# EAGLE board HominiPulseSensorBatt_Panelized (EAGLE 8.0.1)
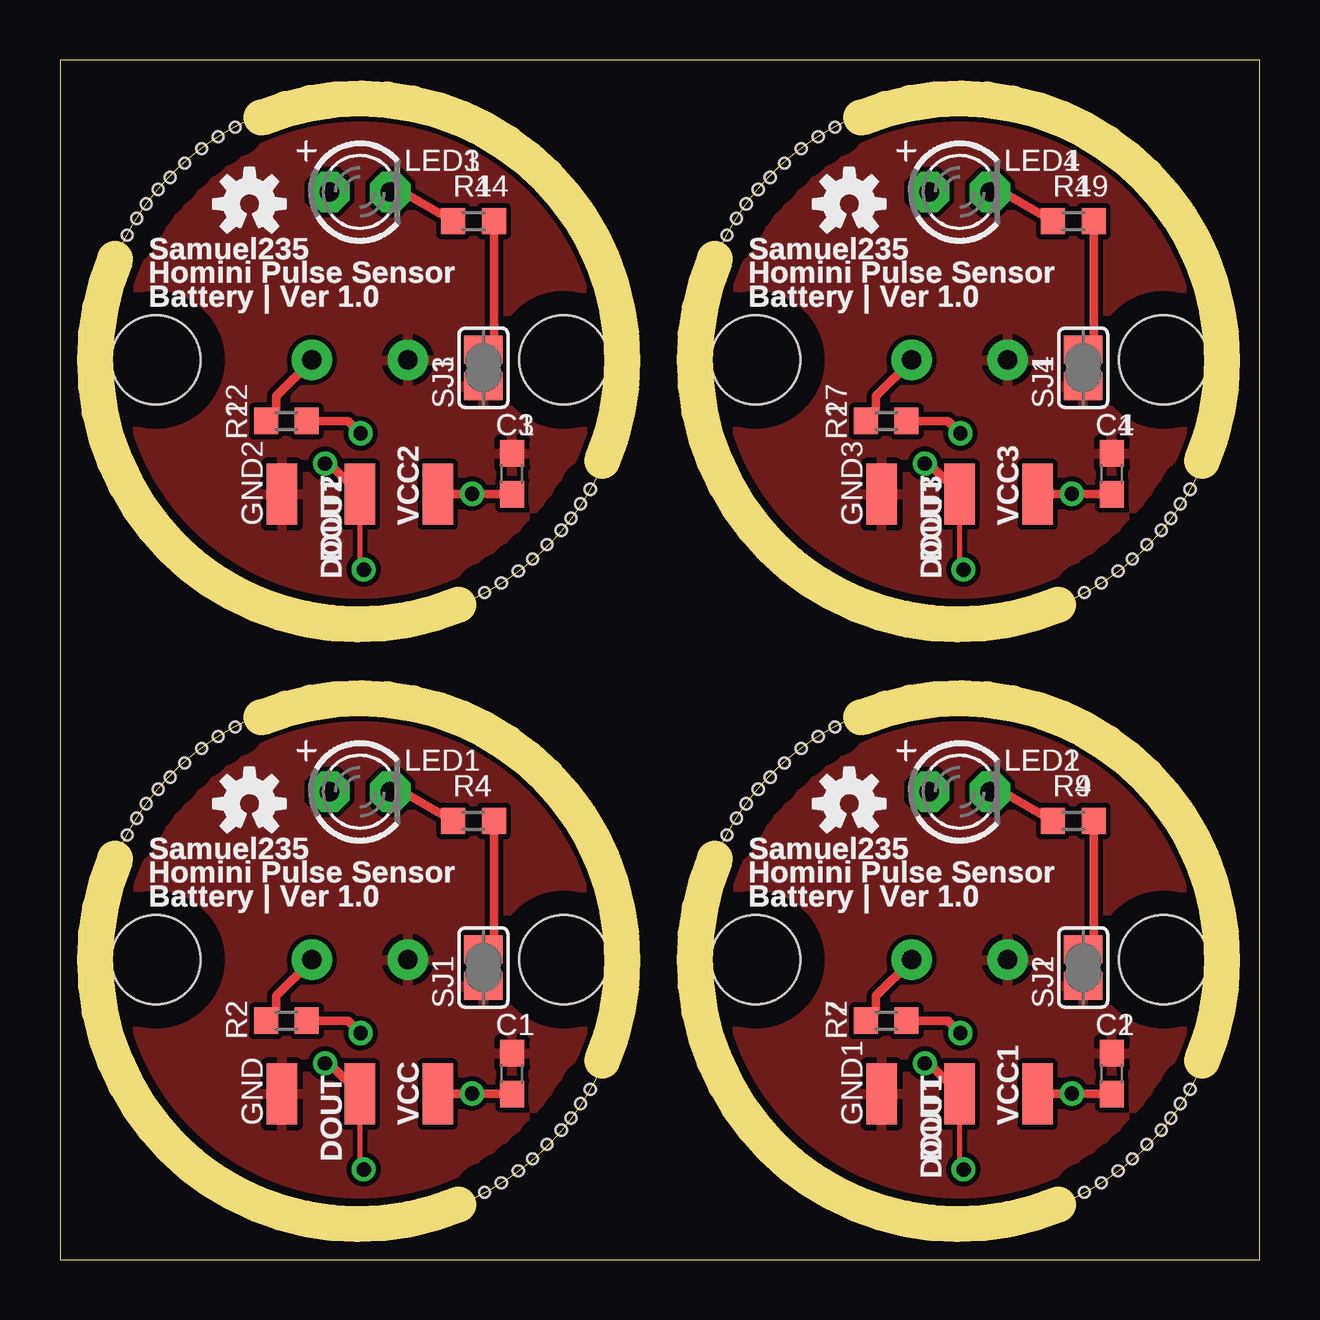
[diagram p0: board, top side]
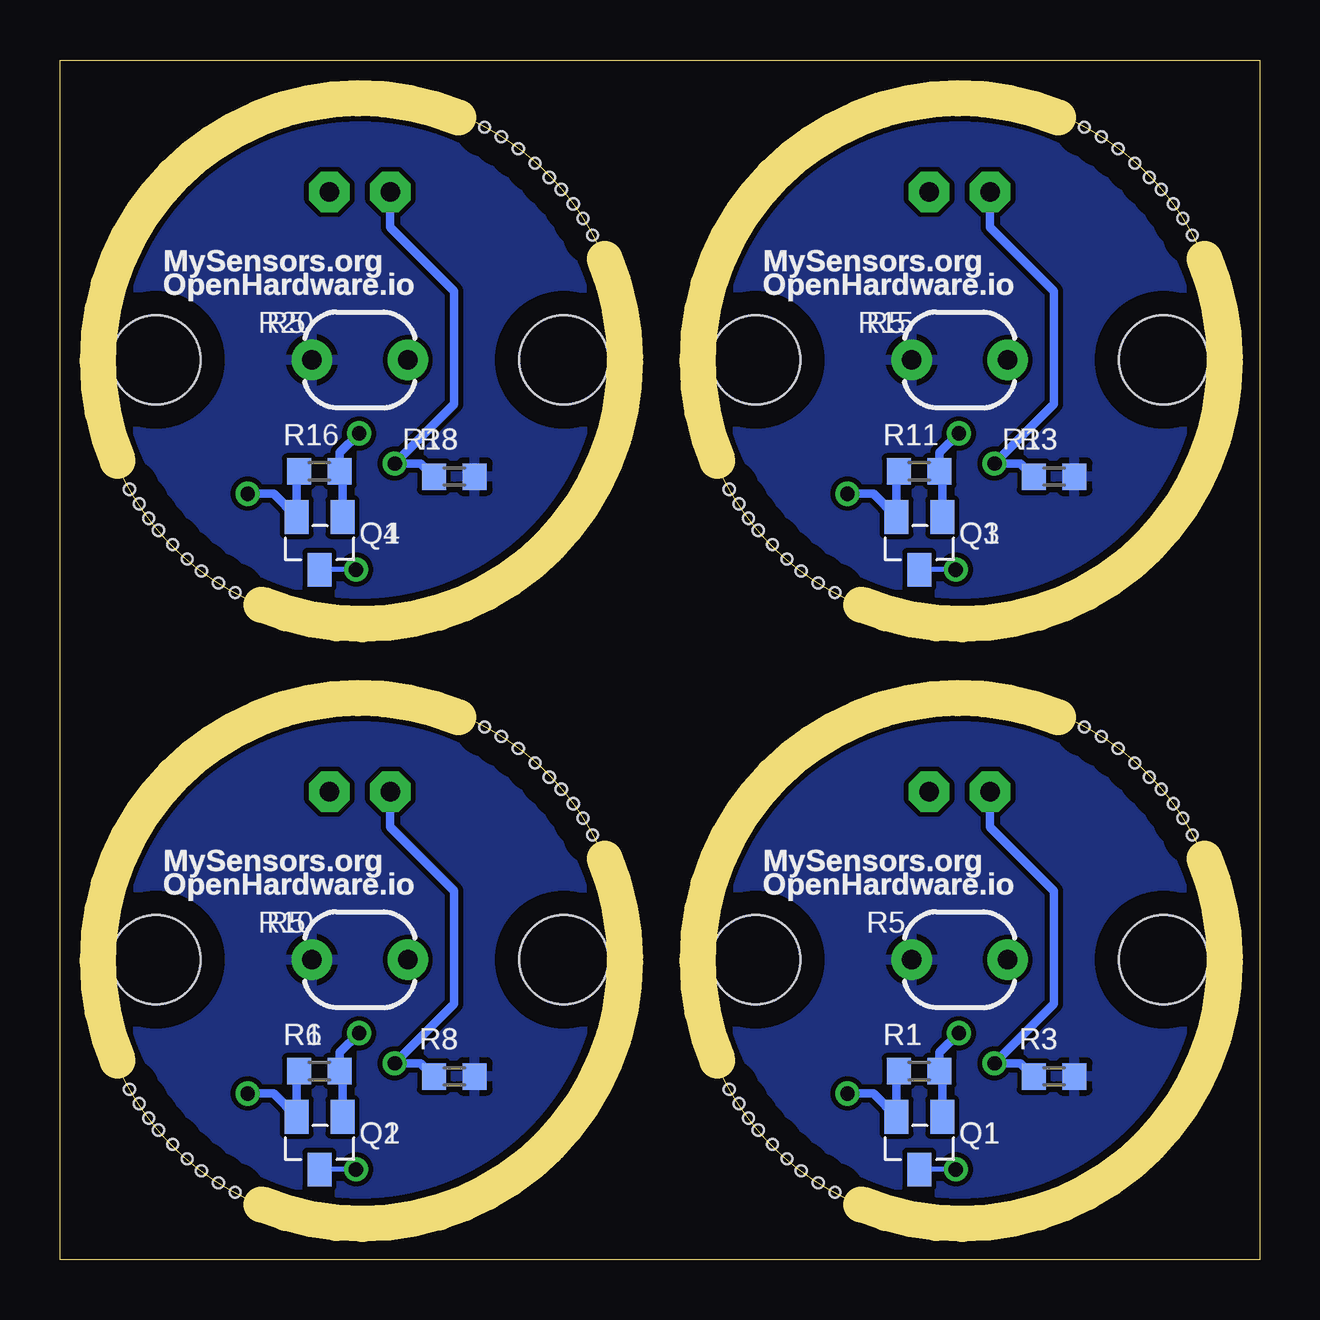
[diagram p1: board, bottom side, seen from below]

Size 50 x 50 mm. Coordinates in mm from the lower left corner, seen from the top.
Outline: 0,0 50,0 50,50 0,50 0,0
Outline: circle at 12.5,12.5 radius 11
Outline: circle at 37.5,12.5 radius 11
Outline: circle at 12.5,37.5 radius 11
Outline: circle at 37.5,37.5 radius 11
Copper layers (1*16): Top 0.035mm / dielectric 1.5mm / Bottom 0.035mm
Design rules "default *": minimum track width 10mil, minimum drill 0.3mm, track to track 8mil, track to pad 8mil, pad to pad 8mil, via to via 8mil, smd to smd 8mil, copper to edge 40mil, drill to drill 8mil, minimum pad ring 10mil, minimum via ring 8mil, stop-mask expansion 4mil, vias tented up to drill 0mil, thermal gap 10mil
Holes 3.7 mm at 4,12.5 21,12.5 29,12.5 46,12.5 4,37.5 21,37.5 29,37.5 46,37.5
Holes 0.45 mm at 2.8,17.7 3.2,18.4 3.6,19 4.1,19.6 4.6,20.1 5.2,20.7 5.9,21.3 6.6,21.8 7.3,22.2 17.7,2.8 18.4,3.2 19.1,3.7 19.7,4.2 20.3,4.8 20.9,5.4 21.3,5.9 21.7,6.5 22.1,7.1 27.8,17.7 28.2,18.4 28.6,19 29.1,19.6 29.6,20.1 30.2,20.7 30.9,21.3 31.6,21.8 32.3,22.2 42.7,2.8 43.4,3.2 44.1,3.7 44.7,4.2 45.3,4.8 45.9,5.4 46.3,5.9 46.7,6.5 47.1,7.1 2.8,42.7 3.2,43.4 3.6,44 4.1,44.6 4.6,45.1 5.2,45.7 5.9,46.3 6.6,46.8 7.3,47.2 17.7,27.8 18.4,28.2 19.1,28.7 19.7,29.2 20.3,29.8 20.9,30.4 21.3,30.9 21.7,31.5 22.1,32.1 27.8,42.7 28.2,43.4 28.6,44 29.1,44.6 29.6,45.1 30.2,45.7 30.9,46.3 31.6,46.8 32.3,47.2 42.7,27.8 43.4,28.2 44.1,28.7 44.7,29.2 45.3,29.8 45.9,30.4 46.3,30.9 46.7,31.5 47.1,32.1
Milling: 8 lines

## Footprints (pad centres in the part's own frame; a part is rotated, then mirrored left to right if it is on the bottom)
C0603 = smd 1.1 x 1: 1 -0.85,0; 2 0.85,0
SMD1,27-2,54 = smd 1.27 x 2.54: 1 0,0
LED3MM = drill 0.813 pad 1.676 octagon: A -1.27,0; K 1.27,0
SOT23 = smd 1 x 1.4: 1 -0.95,-1.1; 2 0.95,-1.1; 3 0,1.1
R0603 = smd 1 x 1.1: 1 -0.85,0; 2 0.85,0
LDR-PTH = drill 0.8 pad 1.676: 1 -2,0; 2 2,0
SJ = smd 1.168 x 1.6: 1 -0.762,0; 2 0.762,0

## Placement (x,y rotation side)
C1  0.1uF  [C0603]  18.85,7.75 90 top
C2  0.1uF  [C0603]  43.85,7.75 90 top
C3  0.1uF  [C0603]  18.85,32.75 90 top
C4  0.1uF  [C0603]  43.85,32.75 90 top
DOUT  [SMD1,27-2,54]  12.5,6.9 0 top
DOUT1  [SMD1,27-2,54]  37.5,6.9 0 top
DOUT2  [SMD1,27-2,54]  12.5,31.9 0 top
DOUT3  [SMD1,27-2,54]  37.5,31.9 0 top
GND  [SMD1,27-2,54]  9.25,6.9 0 top
GND1  [SMD1,27-2,54]  34.25,6.9 0 top
GND2  [SMD1,27-2,54]  9.25,31.9 0 top
GND3  [SMD1,27-2,54]  34.25,31.9 0 top
LED1  Red  [LED3MM]  12.5,19.5 0 top
LED2  Red  [LED3MM]  37.5,19.5 0 top
LED3  Red  [LED3MM]  12.5,44.5 0 top
LED4  Red  [LED3MM]  37.5,44.5 0 top
LOGO1  OSHW-LOGOS  [OSHW-LOGO-S]  7.9,19 0 top
LOGO2  OSHW-LOGOS  [OSHW-LOGO-S]  32.9,19 0 top
LOGO3  OSHW-LOGOS  [OSHW-LOGO-S]  7.9,44 0 top
LOGO4  OSHW-LOGOS  [OSHW-LOGO-S]  32.9,44 0 top
Q1  BS250SMD  [SOT23]  14.18,4.85 180 bottom
Q2  BS250SMD  [SOT23]  39.18,4.85 180 bottom
Q3  BS250SMD  [SOT23]  14.18,29.85 180 bottom
Q4  BS250SMD  [SOT23]  39.18,29.85 180 bottom
R1  330K  [R0603]  14.19,7.85 180 bottom
R2  100K  [R0603]  9.44,9.95 0 top
R3  470K  [R0603]  8.56,7.63 180 bottom
R4  1K5  [R0603]  17.24,18.28 180 top
R5  5549-LDR  [LDR-PTH]  12.5,12.5 0 bottom
R6  330K  [R0603]  39.19,7.85 180 bottom
R7  100K  [R0603]  34.44,9.95 0 top
R8  470K  [R0603]  33.56,7.63 180 bottom
R9  1K5  [R0603]  42.24,18.28 180 top
R10  5549-LDR  [LDR-PTH]  37.5,12.5 0 bottom
R11  330K  [R0603]  14.19,32.85 180 bottom
R12  100K  [R0603]  9.44,34.95 0 top
R13  470K  [R0603]  8.56,32.63 180 bottom
R14  1K5  [R0603]  17.24,43.28 180 top
R15  5549-LDR  [LDR-PTH]  12.5,37.5 0 bottom
R16  330K  [R0603]  39.19,32.85 180 bottom
R17  100K  [R0603]  34.44,34.95 0 top
R18  470K  [R0603]  33.56,32.63 180 bottom
R19  1K5  [R0603]  42.24,43.28 180 top
R20  5549-LDR  [LDR-PTH]  37.5,37.5 0 bottom
SJ1  [SJ]  17.65,12.17 90 top
SJ2  [SJ]  42.65,12.17 90 top
SJ3  [SJ]  17.65,37.17 90 top
SJ4  [SJ]  42.65,37.17 90 top
VCC  [SMD1,27-2,54]  15.75,6.9 0 top
VCC1  [SMD1,27-2,54]  40.75,6.9 0 top
VCC2  [SMD1,27-2,54]  15.75,31.9 0 top
VCC3  [SMD1,27-2,54]  40.75,31.9 0 top

## Library data of the parts
C1-C4 R1-R4 R6-R9 R11-R14 R16-R19 = rcl
DOUT DOUT1-DOUT3 GND GND1-GND3 VCC VCC1-VCC3 = wirepad
LED1-LED4 = adafruit
LOGO1-LOGO4 = SparkFun-Aesthetics
Q1-Q4 = transistor-small-signal
R5 R10 R15 R20 = Misc
SJ1-SJ4 = jumper

## Nets
GND: C1.2 GND.1 R3.1 R5.1 SJ1.1
GND1: C2.2 GND1.1 R8.1 R10.1 SJ2.1
GND2: C3.2 GND2.1 R13.1 R15.1 SJ3.1
GND3: C4.2 GND3.1 R18.1 R20.1 SJ4.1
N$1: Q1.1 R1.1 R2.2
N$2: R2.1 R5.2
N$3: DOUT.1 LED1.A Q1.3 R3.2
N$4: R4.1 SJ1.2
N$5: LED1.K R4.2
N$6: Q2.1 R6.1 R7.2
N$7: R7.1 R10.2
N$8: DOUT1.1 LED2.A Q2.3 R8.2
N$9: R9.1 SJ2.2
N$10: LED2.K R9.2
N$11: Q3.1 R11.1 R12.2
N$12: R12.1 R15.2
N$13: DOUT2.1 LED3.A Q3.3 R13.2
N$14: R14.1 SJ3.2
N$15: LED3.K R14.2
N$16: Q4.1 R16.1 R17.2
N$17: R17.1 R20.2
N$18: DOUT3.1 LED4.A Q4.3 R18.2
N$19: R19.1 SJ4.2
N$20: LED4.K R19.2
VCC: C1.1 Q1.2 R1.2 VCC.1
VCC1: C2.1 Q2.2 R6.2 VCC1.1
VCC2: C3.1 Q3.2 R11.2 VCC2.1
VCC3: C4.1 Q4.2 R16.2 VCC3.1

## Tracks (layer width: path | path; a pad name or v marks a point on that pad's centre or on a via)
GND
  pour Top: 3.8,19.5 5.8,21.3 8,22.5 10.2,23.2 13.1,23.4 15.7,23 17.7,22.2 19.6,20.9 20.9,19.5 22.2,17.7 23,16 23.4,13.9 23.5,11.7 23.2,9.7 22.5,7.8 21.4,5.9 20.1,4.5 17.5,2.7 15.3,1.8 12.7,1.4 9.8,1.7 7.6,2.5 6.1,3.4 4.5,4.8 2.7,7.4 1.9,9.6 1.5,12.5 1.8,15.1 2.7,17.5
  pour Bottom: 4.3,20 6.1,21.5 8.1,22.5 9.9,23.2 12.2,23.5 14.9,23.2 17.5,22.3 19.4,21.1 20.8,19.7 22.2,17.7 23.1,15.5 23.5,13.1 23.4,11 23,9.1 22.1,6.9 21.3,5.8 20.4,4.9 18.6,3.3 17,2.5 15,1.7 12.5,1.5 10.4,1.7 8.5,2.3 7,2.9 5.7,3.8 4.4,5 3.3,6.5 2.4,8 1.9,9.6 1.5,11.2 1.5,13.6 2.1,16.2 3.1,18.3
GND1
  pour Top: 28.8,19.5 30.8,21.3 33,22.5 35.2,23.2 38.1,23.4 40.7,23 42.7,22.2 44.6,20.9 45.9,19.5 47.2,17.7 48,16 48.4,13.9 48.5,11.7 48.2,9.7 47.5,7.8 46.4,5.9 45.1,4.5 42.5,2.7 40.3,1.8 37.7,1.4 34.8,1.7 32.6,2.5 31.1,3.4 29.5,4.8 27.7,7.4 26.9,9.6 26.5,12.5 26.8,15.1 27.7,17.5
  pour Bottom: 29.3,20 31.1,21.5 33.1,22.5 34.9,23.2 37.2,23.5 39.9,23.2 42.5,22.3 44.4,21.1 45.8,19.7 47.2,17.7 48.1,15.5 48.5,13.1 48.4,11 48,9.1 47.1,6.9 46.3,5.8 45.4,4.9 43.6,3.3 42,2.5 40,1.7 37.5,1.5 35.4,1.7 33.5,2.3 32,2.9 30.7,3.8 29.4,5 28.3,6.5 27.4,8 26.9,9.6 26.5,11.2 26.5,13.6 27.1,16.2 28.1,18.3
GND2
  pour Top: 3.8,44.5 5.8,46.3 8,47.5 10.2,48.2 13.1,48.4 15.7,48 17.7,47.2 19.6,45.9 20.9,44.5 22.2,42.7 23,41 23.4,38.9 23.5,36.7 23.2,34.7 22.5,32.8 21.4,30.9 20.1,29.5 17.5,27.7 15.3,26.8 12.7,26.4 9.8,26.7 7.6,27.5 6.1,28.4 4.5,29.8 2.7,32.4 1.9,34.6 1.5,37.5 1.8,40.1 2.7,42.5
  pour Bottom: 4.3,45 6.1,46.5 8.1,47.5 9.9,48.2 12.2,48.5 14.9,48.2 17.5,47.3 19.4,46.1 20.8,44.7 22.2,42.7 23.1,40.5 23.5,38.1 23.4,36 23,34.1 22.1,31.9 21.3,30.8 20.4,29.9 18.6,28.3 17,27.5 15,26.7 12.5,26.5 10.4,26.7 8.5,27.3 7,27.9 5.7,28.8 4.4,30 3.3,31.5 2.4,33 1.9,34.6 1.5,36.2 1.5,38.6 2.1,41.2 3.1,43.3
GND3
  pour Top: 28.8,44.5 30.8,46.3 33,47.5 35.2,48.2 38.1,48.4 40.7,48 42.7,47.2 44.6,45.9 45.9,44.5 47.2,42.7 48,41 48.4,38.9 48.5,36.7 48.2,34.7 47.5,32.8 46.4,30.9 45.1,29.5 42.5,27.7 40.3,26.8 37.7,26.4 34.8,26.7 32.6,27.5 31.1,28.4 29.5,29.8 27.7,32.4 26.9,34.6 26.5,37.5 26.8,40.1 27.7,42.5
  pour Bottom: 29.3,45 31.1,46.5 33.1,47.5 34.9,48.2 37.2,48.5 39.9,48.2 42.5,47.3 44.4,46.1 45.8,44.7 47.2,42.7 48.1,40.5 48.5,38.1 48.4,36 48,34.1 47.1,31.9 46.3,30.8 45.4,29.9 43.6,28.3 42,27.5 40,26.7 37.5,26.5 35.4,26.7 33.5,27.3 32,27.9 30.7,28.8 29.4,30 28.3,31.5 27.4,33 26.9,34.6 26.5,36.2 26.5,38.6 27.1,41.2 28.1,43.3
N$1  (via drill 0.6)
  Top 0.356: v12.53,9.44 12.02,9.95 R2.2
  Bottom 0.356: Q1.1 13.23,7.74 R1.1 13.34,8.63 v12.53,9.44
N$2
  Top 0.356: R2.1 9.02,10.38 9.02,10.98 10.5,12.47 R5.2
N$3  (via drill 0.6)
  Top 0.203: DOUT.1 12.5,3.92 v12.66,3.76
  Top 0.356: DOUT.1 11.22,8.18 v11.05,8.18
  Bottom 0.203: v12.66,3.76 14.17,3.76 Q1.3
  Bottom 0.356: LED1.A 11.23,18.04 8.56,15.37 8.56,10.66 v11.05,8.18 9.96,8.18 R3.2
N$4
  Top 0.356: R4.1 18.09,13.37 SJ1.2
N$5
  Top 0.356: R4.2 14.31,19.5 LED1.K
N$6  (via drill 0.6)
  Top 0.356: v37.53,9.44 37.02,9.95 R7.2
  Bottom 0.356: Q2.1 38.23,7.74 R6.1 38.34,8.63 v37.53,9.44
N$7
  Top 0.356: R7.1 34.02,10.38 34.02,10.98 35.5,12.47 R10.2
N$8  (via drill 0.6)
  Top 0.203: DOUT1.1 37.5,3.92 v37.66,3.76
  Top 0.356: DOUT1.1 36.22,8.18 v36.05,8.18
  Bottom 0.203: v37.66,3.76 39.17,3.76 Q2.3
  Bottom 0.356: LED2.A 36.23,18.04 33.56,15.37 33.56,10.66 v36.05,8.18 34.96,8.18 R8.2
N$9
  Top 0.356: R9.1 43.09,13.37 SJ2.2
N$10
  Top 0.356: R9.2 39.31,19.5 LED2.K
N$11  (via drill 0.6)
  Top 0.356: v12.53,34.44 12.02,34.95 R12.2
  Bottom 0.356: Q3.1 13.23,32.74 R11.1 13.34,33.63 v12.53,34.44
N$12
  Top 0.356: R12.1 9.02,35.38 9.02,35.98 10.5,37.47 R15.2
N$13  (via drill 0.6)
  Top 0.203: DOUT2.1 12.5,28.92 v12.66,28.76
  Top 0.356: DOUT2.1 11.22,33.18 v11.05,33.18
  Bottom 0.203: v12.66,28.76 14.17,28.76 Q3.3
  Bottom 0.356: LED3.A 11.23,43.04 8.56,40.37 8.56,35.66 v11.05,33.18 9.96,33.18 R13.2
N$14
  Top 0.356: R14.1 18.09,38.37 SJ3.2
N$15
  Top 0.356: R14.2 14.31,44.5 LED3.K
N$16  (via drill 0.6)
  Top 0.356: v37.53,34.44 37.02,34.95 R17.2
  Bottom 0.356: Q4.1 38.23,32.74 R16.1 38.34,33.63 v37.53,34.44
N$17
  Top 0.356: R17.1 34.02,35.38 34.02,35.98 35.5,37.47 R20.2
N$18  (via drill 0.6)
  Top 0.203: DOUT3.1 37.5,28.92 v37.66,28.76
  Top 0.356: DOUT3.1 36.22,33.18 v36.05,33.18
  Bottom 0.203: v37.66,28.76 39.17,28.76 Q4.3
  Bottom 0.356: LED4.A 36.23,43.04 33.56,40.37 33.56,35.66 v36.05,33.18 34.96,33.18 R18.2
N$19
  Top 0.356: R19.1 43.09,38.37 SJ4.2
N$20
  Top 0.356: R19.2 39.31,44.5 LED4.K
VCC  (via drill 0.6)
  Top 0.356: C1.1 17.84,6.9 v17.18,6.92 17.16,6.9 VCC.1
  Bottom 0.356: R1.2 15.13,7.86 Q1.2 16.1,6.92 v17.18,6.92
VCC1  (via drill 0.6)
  Top 0.356: C2.1 42.84,6.9 v42.18,6.92 42.16,6.9 VCC1.1
  Bottom 0.356: R6.2 40.13,7.86 Q2.2 41.1,6.92 v42.18,6.92
VCC2  (via drill 0.6)
  Top 0.356: C3.1 17.84,31.9 v17.18,31.92 17.16,31.9 VCC2.1
  Bottom 0.356: R11.2 15.13,32.85 Q3.2 16.1,31.92 v17.18,31.92
VCC3  (via drill 0.6)
  Top 0.356: C4.1 42.84,31.9 v42.18,31.92 42.16,31.9 VCC3.1
  Bottom 0.356: R16.2 40.13,32.85 Q4.2 41.1,31.92 v42.18,31.92

## Text on the board
tNames: Samuel235 / Homini Pulse Sensor / Battery | Ver 1.0 | Samuel235 / Homini Pulse Sensor / Battery | Ver 1.0 | Samuel235 / Homini Pulse Sensor / Battery | Ver 1.0 | Samuel235 / Homini Pulse Sensor / Battery | Ver 1.0 | Samuel235 / Homini Pulse Sensor / Battery | Ver 1.0 | Samuel235 / Homini Pulse Sensor / Battery | Ver 1.0 | Samuel235 / Homini Pulse Sensor / Battery | Ver 1.0 | Samuel235 / Homini Pulse Sensor / Battery | Ver 1.0
bNames: MySensors.org / OpenHardware.io | MySensors.org / OpenHardware.io | MySensors.org / OpenHardware.io | MySensors.org / OpenHardware.io | MySensors.org / OpenHardware.io | MySensors.org / OpenHardware.io | MySensors.org / OpenHardware.io | MySensors.org / OpenHardware.io
_tNames: LED1 | LED1 | R4 | R4 | Samuel235 / Homini Pulse Sensor / Battery | Ver 1.0 | Samuel235 / Homini Pulse Sensor / Battery | Ver 1.0 | SJ1 | SJ1 | R2 | C1 | R2 | C1 | DOUT | DOUT | GND | VCC | GND | VCC | LED1 | LED1 | R4 | R4 | Samuel235 / Homini Pulse Sensor / Battery | Ver 1.0 | Samuel235 / Homini Pulse Sensor / Battery | Ver 1.0 | SJ1 | SJ1 | R2 | C1 | R2 | C1 | DOUT | DOUT | GND | VCC | GND | VCC
_bNames: MySensors.org / OpenHardware.io | MySensors.org / OpenHardware.io | R5 | R5 | R3 | R3 | R1 | R1 | Q1 | Q1 | MySensors.org / OpenHardware.io | MySensors.org / OpenHardware.io | R5 | R5 | R3 | R3 | R1 | R1 | Q1 | Q1